# Altium PCB PCB.PcbDoc
Units mil, origin at the board's own origin, x right, y up, seen from the top; angles counter-clockwise.
Board outline 6023.62 x 2275.46 mil, 2 copper layers (Top Layer, Bottom Layer); 31 components, 24 nets, 110 pads, 32 vias.
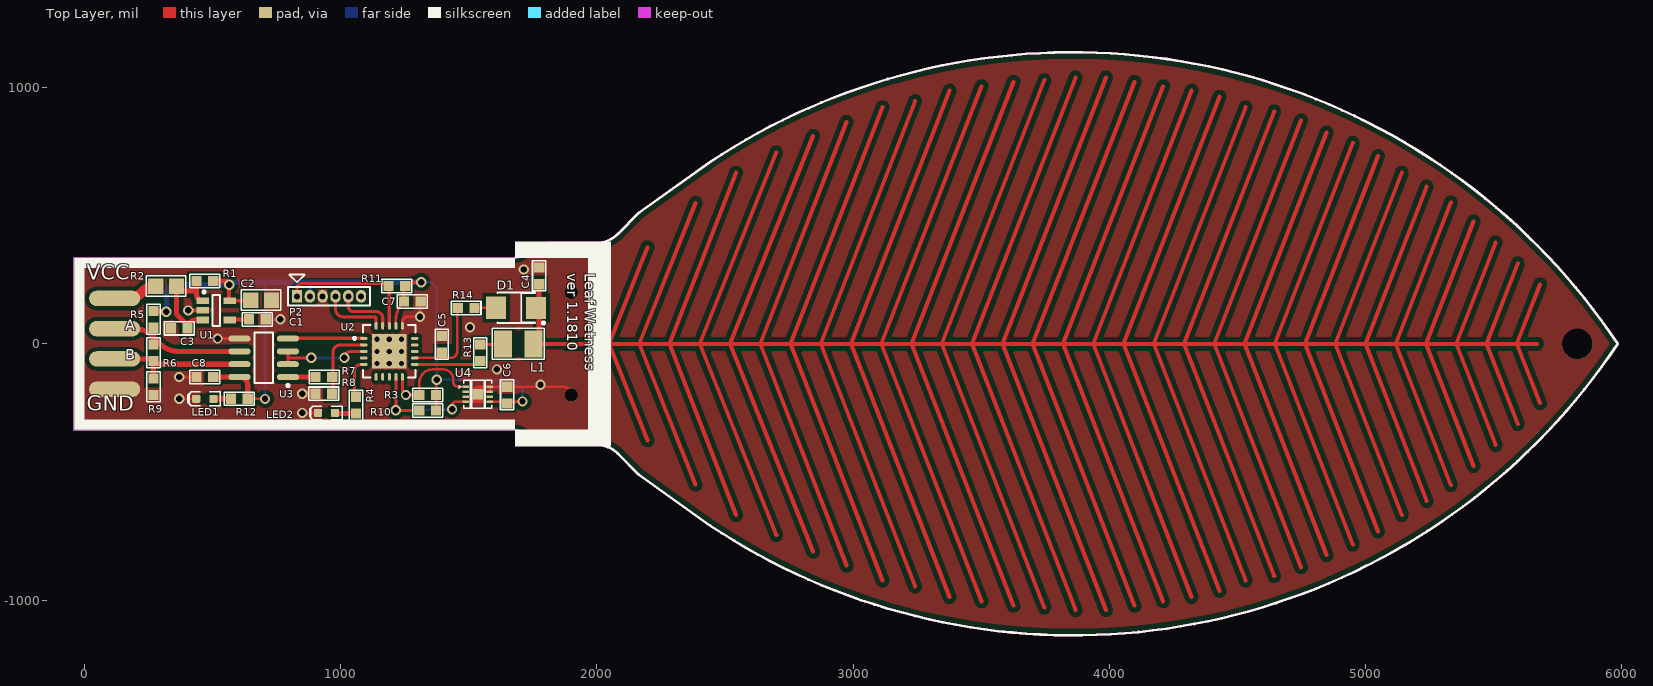
[diagram p0: Top Layer view]
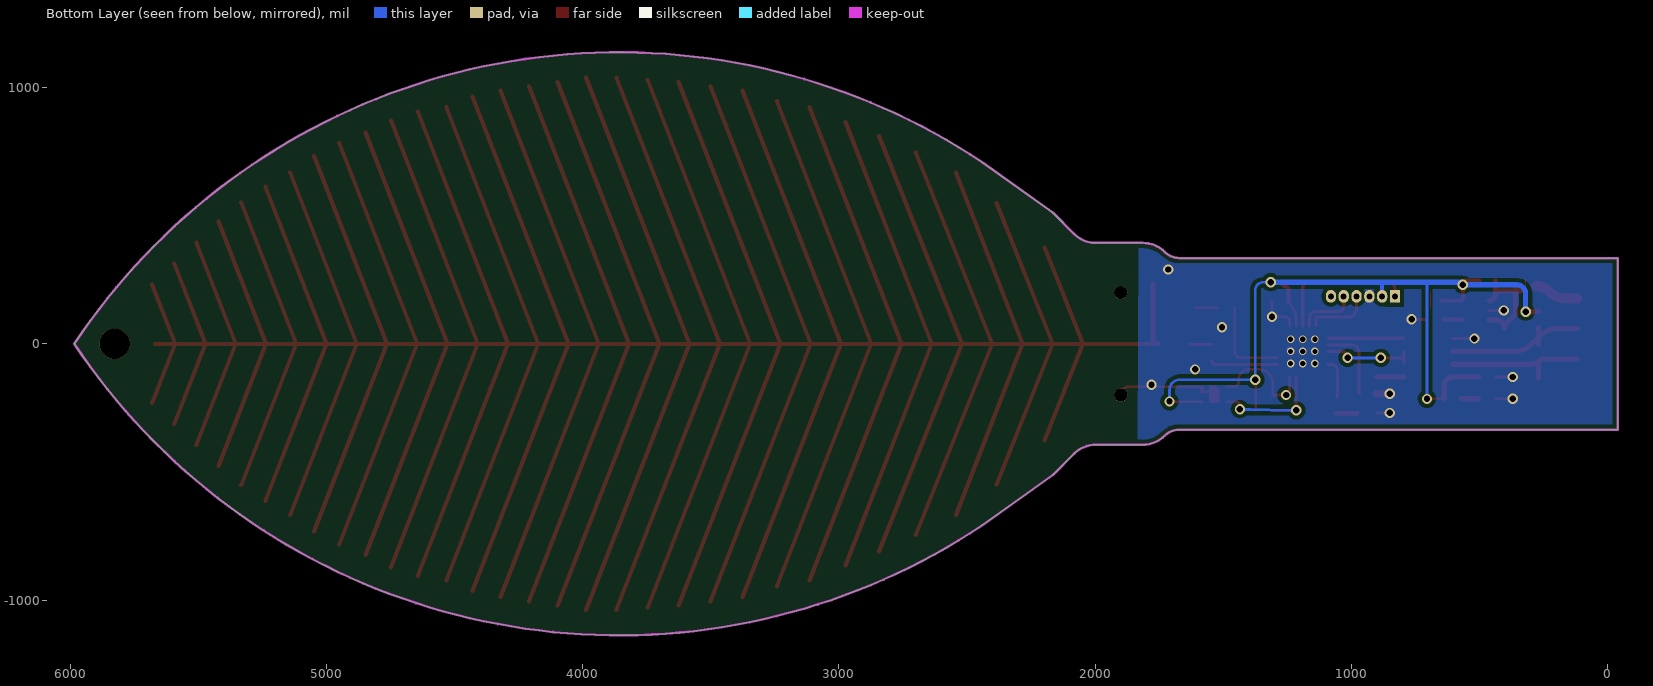
[diagram p1: Bottom Layer view, seen from below]

## Layer stack, top to bottom
Top Solder: solder mask 0.4, Solder Resist, Dk 3.5
Top Layer: signal copper 1.4
Dielectric1: dielectric 12.6, FR-4, Dk 4.8
Bottom Layer: signal copper 1.4
Bottom Solder: solder mask 0.4, Solder Resist, Dk 3.5

## Board outline
1576.71,-334.65 1671.13,-334.65 cw(c1671.13,-415.56) 1728.35,-358.35 ccw(c1813.7,-272.99) 1813.7,-393.7 1997.24,-393.7 cw(c1997.24,-514.41) 2082.6,-429.06 2165.35,-511.81 2440.94,-708.66 ccw(c3858.27,1417.32) 5984.25,0 ccw(c3858.27,-1417.32) 2440.94,708.66 2165.35,511.81 2082.6,429.06 cw(c1997.24,514.41) 1997.24,393.7 1813.7,393.7 ccw(c1813.7,272.99) 1728.35,358.35 cw(c1671.13,415.56) 1671.13,334.65 -39.37,334.65 -39.37,-334.65

## Design rules (kind name [scope] priority, off if disabled: settings)
Clearance [All] p1: gap=7 ignorepadtopadclearanceinfootprint=FALSE
ComponentClearance [All] p1 off: gap=10 collisioncheckmode=3 verticalgap=10 showdistances=FALSE
PlaneConnect [All] p1: planeconnectstyle=Direct reliefexpansion=20 reliefentries=4 reliefconductorwidth=10 reliefairgap=10
PolygonConnect [All] p1: connectstyle=Direct reliefconductorwidth=10 reliefentries=4 polygonreliefangle="90 Angle" airgapwidth=10
RoutingVias [All] p1: holewidth=25 width=40 viastyle="Through Hole" minholewidth=20 minwidth=35 maxholewidth=28 maxwidth=50
SolderMaskExpansion [All] p1: expansion=4
Width [All] p1: maxlimit=40 minlimit=10 preferedwidth=10
28 further rules are at their usual default settings.

## Classes and differential pairs
component class Sensor: C4 C5 C6 D1 L1 R13 R14 U4
component class MCU: C7 LED2 P2 R3 R4 R10 R11 U2
component class PowerSupply: C1 C2 C3 LED1 R1 R2 R12 U1
component class RS485: C8 R5 R6 R7 R8 R9 U3

## Components (designator, comment, footprint, x,y, rotation, side; value= is the part's Value field where it differs from the comment)
C1 "100nF" 0603 675,95.35 r180 top
C2 "2.2uF" 0805 690,170.35 r180 top value=100nF
C3 "100nF" 0603 370,60.35 r0 top
C4 "1nF" 0603 1775,265 r270 top
C5 "10nF" 0603 1395,-2.44 r270 top
C6 "100nF" 0603 1650,-200 r270 top
C7 "100nF" 0603 1280,165.35 r0 top
C8 "100nF" 0603 470,-129.65 r180 top
D1 "1N4148" D1810 1685,140 r180 top
L1 "1uH" 1210 1692.91,0 r0 top value=1.5µH
LED1 "RED" LED-0603-RED 470,-214.65 r180 top
LED2 "White" LED-0603-RED 945,-269.65 r180 top
P2 "Header 6" MHDR1X6 830,185.35 r0 top
R1 "dnp" 0603 470,245.35 r180 top value=1M
R2 "RTCC" 0805 319.25,225.04 r0 top
R3 "10k" 0603 1340,-199.65 r0 top value=1K
R4 "1k" 0603 1060,-239.65 r270 top value=1K
R5 "100k" 0603 269.69,95.04 r270 top value=4K7
R6 "dnp" 0603 269.69,-34.96 r270 top value=4K7
R7 "1k" 0603 935,-129.65 r180 top value=1M
R8 "dnp" 0603 935,-194.65 r0 top value=1M
R9 "100k" 0603 269.69,-167.52 r270 top value=4K7
R10 "10k" 0603 1340,-260 r0 top value=1K
R11 "10k" 0603 1220,225.35 r0 top value=1K
R12 "10k" 0603 605,-214.65 r0 top value=1M
R13 "150 1%" 0603 1545,-35 r90 top value=1M
R14 "1M" 0603 1490,140 r0 top
U1 "MIC5319-3.3" sot23-5 515,130.35 r270 top
U2 "PIC24F16KL401-I/MQ" QFN-MQ20_N 1190,-29.65 r0 top
U3 "ISL83485IBZ" SO8 700,-54.65 r180 top
U4 "SHT30" QFN50P250X250X100_HS-9N 1535.43,-196.85 r0 top

## Footprints (in the part's own frame and the unit in brackets; to place one, negate y for a bottom-side part, rotate by r counter-clockwise, add the part's x,y. Pads: shape width x height; smd on the part's side, far side on the other; paste and mask are expansions set on the pad)
0603 [mil]
  rect 40x40 smd: 1(-32.56,0) 2(32.56,0)
  silkscreen extent -59,-26 58,26, body extent -34,-19 34,19, height 51
0805 [mil]
  rect 60x60 smd: 1(-40.43,0) 2(40.43,0)
  Top Layer lines w0: 0,27 0,28 0,-28
  silkscreen extent -77,-40 77,40, body extent -42,-28 42,28, height 28
1210 [mil]
  rect 70x105 smd: 1(-59.75,0) 2(59.75,0)
  Top Layer pour cut-out: -23,53 22,53 22,-53 -23,-53
  silkscreen extent -101,-60 102,60, body extent -66,-52 66,52, height 35
D1810 [mil]
  rect 78.74x86.61 smd: 1(78,-0.5) 2(-78,0.5)
  silkscreen extent -111,-60 73,63, body extent -90,-54 95,52, height 35
LED-0603-RED [mm]
  round 0.254 on Mech15: 0(0,0)
  rrect25% 0.8x0.8 smd: A(-0.85,0) K(0.85,0)
  Top Layer pour cut-out: -0.5,0.5 0.5,0.5 0.5,-0.5 -0.5,-0.5
  silkscreen extent -1.55,-0.67 1.68,0.67, body extent -0.8,-0.4 0.8,0.4, height 0.75
MHDR1X6 [mil] "Connector; Header; 6 Position"
  rect 40x50 hole 23.62: 1(0,0)
  oval 40x50 hole 23.62: 2(50,0) 3(100,0) 4(150,0) 5(200,0) 6(250,0)
  silkscreen extent -35,-35 285,35
QFN50P250X250X100_HS-9N [mm] "QFN, 8-Leads, Body 2.50x2.50mm, Pitch 0.50mm, Thermal Pad 1.80x1.10mm, IPC Medium Density"
  rect 1x1 smd paste+0.1: 0(0,0)
  rect 0.65x0.25 smd paste+0.1: 1(-1.2,0.75) 2(-1.2,0.25) 3(-1.2,-0.25) 4(-1.2,-0.75) 5(1.2,-0.75) 6(1.2,-0.25) 7(1.2,0.25) 8(1.2,0.75)
  Top Layer region: 0.5,-0.85 0.5,0.85 -0.175,0.85 -0.5,0.525 -0.5,-0.85
  silkscreen extent -1.88,-1.37 1.38,1.38, body extent -1.3,-1.3 1.3,1.3, height 1
QFN-MQ20_N [mm] "QFN, 20-Leads, Body 5x5 mm, Pitch 0.65mm, IPC Medium Density"
  oval 0.75x0.3 smd: 1(-2.525,1.3) 2(-2.525,0.65) 3(-2.525,0) 4(-2.525,-0.65) 5(-2.525,-1.3) 11(2.525,-1.3) 12(2.525,-0.65) 13(2.525,0) 14(2.525,0.65) 15(2.525,1.3)
  oval 0.3x0.75 smd: 6(-1.3,-2.525) 7(-0.65,-2.525) 8(0,-2.525) 9(0.65,-2.525) 10(1.3,-2.525) 16(1.3,2.525) 17(0.65,2.525) 18(0,2.525) 19(-0.65,2.525) 20(-1.3,2.525)
  rect 3.4x3.4 smd: 21(0,0)
  silkscreen extent -3.57,-2.6 2.6,2.6, body extent -2.58,-2.58 2.58,2.58, height 1
SO8 [mm]
  oval 2.2x0.6 smd: 1(-2.4,1.905) 2(-2.4,0.635) 3(-2.4,-0.635) 4(-2.4,-1.905) 5(2.4,-1.905) 6(2.4,-0.635) 7(2.4,0.635) 8(2.4,1.905)
  silkscreen extent -2.53,-2.5 0.9,2.88, body extent -2,-2.5 2,2.5, height 1.75
sot23-5 [mm]
  rect 0.65x1.25 smd: 1(-0.95,-1.327) 2(0,-1.327) 3(0.95,-1.327) 4(0.95,1.327) 5(-0.95,1.327)
  silkscreen extent -1.95,-1.32 1.55,0.38, body extent -1.55,-0.9 1.55,0.9, height 1.45

## Part data
C1 C2 C3 C7 C8: library part "Cap Semi", "Capacitor (Semiconductor SIM Model)", LatestRevisionDate=29-May-2009, LatestRevisionNote="IPC-7351 Footprint Added.", PackageDescription="Chip Capacitor", PackageReference=C1206, Published=8-Jun-2000, Publisher="Altium Limited"
C4 C5 C6: library part C_0402, Manufacturer=AVX, Manufacturer Part Number=04023A101JAT2A, Supplier Part Number 1=1327622, ComponentLink1Description=http://www.avx.com/docs/Catalogs/ccog.pdf, ComponentLink1URL=http://www.avx.com/docs/Catalogs/ccog.pdf, Pricing 1="10=0,129, 100=0,099, 500=0,067, 1000=0,056, 5000=0,043 (EUR)", RoHS=YES, Stock 1=84696, Supplier 1=Farnell
D1: library part Diode, "Default Diode", Code_JEDEC=DO-214-AB, LatestRevisionDate=17-Jul-2002, LatestRevisionNote="Re-released for DXP Platform.", PackageDescription="DO-214-AB/SMC; 2 C-Bend Leads; Body 7.9 x 5.9 mm, inc. leads (LxW)", PackageReference=SMC, PackageVersion=Sep-1996, Published=8-Jun-2000, Publisher="Altium Limited"
L1: library part Inductor, "Inductor", Code_IEC=1005, Code_JEITA=0402, LatestRevisionDate=29-May-2009, LatestRevisionNote="IPC-7351 Footprint Added.", PackageDescription="Chip Inductor", PackageReference=0402-A, Published=8-Jun-2000, Publisher="Altium Limited"
LED1 LED2: library part SMD_LED_0805
P2: "Header, 6-Pin", LatestRevisionDate=17-Jul-2002, LatestRevisionNote="Re-released for DXP Platform.", Publisher="Altium Limited"
R1 R5 R6 R7 R8 R9 R12 R13 R14: library part "Res Semi", "Semiconductor Resistor", LatestRevisionDate=17-Jul-2002, LatestRevisionNote="Re-released for DXP Platform.", PackageReference=AXIAL-0.5, Published=8-Jun-2000, Publisher="Altium Limited"
R2: library part Ferritbeat, Manufacturer=MURATA, Manufacturer Part Number=BLM18EG471SN1D, Supplier Part Number 1=1515722, ComponentLink1Description=http://www.farnell.com/datasheets/5169.pdf, ComponentLink1URL=http://www.farnell.com/datasheets/5169.pdf, Pricing 1="5=0,196, 50=0,17, 100=0,14, 250=0,112, 500=0,101, 2000=0,092 (EUR)", RoHS=YES, Stock 1=11384, Supplier 1=Farnell
R3 R4 R10 R11: library part Res1, "Resistor", LatestRevisionDate=17-Jul-2002, LatestRevisionNote="Re-released for DXP Platform.", PackageReference=AXIAL-0.3, Published=8-Jun-2000, Publisher="Altium Limited"
U1: library part MIC5305
U2: library part PIC24F04KA201T-I/MQ, "General Purpose 16-Bit Flash Microcontroller with nanoWatt XLP Technology, 4KB Flash, 512 bytes SRAM, 20-Pin QFN, Industrial Temperature, Tape and Reel", Supplier Part Number 1=PIC24F04KA201T-I/MQ-ND, ComponentLink1Description=Datasheet, ComponentLink1URL=http://ww1.microchip.com/downloads/en/DeviceDoc/39937b.pdf, ComponentLink2Description="Packaging Specification", ComponentLink2URL=http://www.microchip.com/stellent/groups/techpub_sg/documents/packagingspec/en012702.pdf, ComponentLink3Description="Microchip.com Home", ComponentLink3URL=http://www.microchip.com/, DatasheetVersion="revB, May-2009", FirstPublished=2-Dec-2009, PackageDescription="20-Lead Plastic Quad Flat, No Lead Package (MQ) - 5x5x0.9 mm Body [QFN]", PackageReference=QFN-MQ20, PackageVersion="revBB, Aug-2009", Publisher="Altium Limited", Supplier 1=Digi-Key, Supplier 2=Newark, Supplier Part Number 2=08R2010
U3: library part SN75176AD, "Differential Bus Transceiver", Code_IPC=SOIC127P600-8, ComponentLink1Description="Manufacturer Link", ComponentLink1URL=http://www.ti.com/, ComponentLink2Description=Datasheet, ComponentLink2URL=http://www-s.ti.com/sc/ds/sn75176a.pdf, DatasheetVersion=Aug-1989, LatestRevisionDate=13-Apr-2006, LatestRevisionNote="IPC-7351 Footprint Added.", Note="Receiver Hysteresis of 50mV Typical", PackageDescription="8-Pin Small Outline Integrated Circuit 1.27 mm Pitch", PackageReference=D008, PackageVersion=Jan-1998, Published=15-May-2002, Publisher="Altium Limited"
U4: library part SHT3x

## Free pads (board coordinates)
  oval 200x60 smd paste+3.94: 1(118.11,-177.17) 1(118.11,-59.06) 1(118.11,59.06) 1(118.11,177.17)
  round 51.18 hole 51.18: ""(1900,-200) ""(1900,200)
  round 118.11 hole 118.11: ""(5826.77,0)

## Via types
v1: diameter 40, hole 25, Top Layer to Bottom Layer, 23 vias
v2: diameter 30, hole 20, Top Layer to Bottom Layer, tented top, 9 vias

## Nets (pads, with @x,y where several pads share a name; then routed paths per layer and width w, separated by ;. In a path a pad name is that pad's centre, name@x,y a point inside that pad or via, vN(x,y) a via of type N, cw(c..) or ccw(c..) an arc to the next point about the centre after c; other vN are vias at no path point)
GND: C1.1 C2.1 C3.1 C4.1 C5.1 C6.1 C7.2 C8.2 LED1.K LED2.K P2.3 pad. pad.1@118.11,-177.17 R8.1 R9.2 U1.2 U2.16 U2.21 U3.5 U4.0 U4.7 U4.8 | length 1018
  Top Layer w11: v1(370,-214.65) LED1.K ; v1(370,-129.65) 370,-134.65 cw(c375,-134.65) 375,-129.65 C8.2 ; v1(405,130.35) U1.2 ; v1(520,20.35) U3.5 ; C1.1 v1(765,95.35) ; v1(850,-269.65) LED2.K@901.54,-269.65 ; U2.16 1241.18,86.54 cw(c1260,86.54) 1260,105.35 v1(1310,105.35) ; v1@1310,115.35 1310,162.8 cw(c1312.56,162.8) C7.2 ; U4.0 cw(c1545.28,-196.85) 1545.28,-187.01 U4.7 U4.8 1867.32,-167.32 cw(c1867.32,-200) pad.@1900,-200
  Top Layer w30: v1(850,-194.65) R8.1
  Bottom Layer w11: v2(1237.24,-29.65) cw(c1246.89,-29.65) v2@1246.89,-20
  other v1: 1780,-160 1610,-100 1505,65 1715,290
  other v2: 1142.76,-76.89 1190,-76.89 1237.24,-76.89 1142.76,-29.65 1190,-29.65 1142.76,17.6 1190,17.6 1237.24,17.6
LED_DEBUG: R4.1 U2.5 | length 154.5
  Top Layer w12: R4.1 cw(c1060,-202.09) 1055,-202.09 1055,-104.65 cw(c1078.82,-104.65) 1078.82,-80.83 U2.5
MCU_PGC: P2.5 U2.19 | length 230.9
  Top Layer w12: P2.5 1030,145.35 ccw(c1050,145.35) 1050,125.35 1140,125.35 cw(c1140,100.94) 1164.41,100.94 U2.19
MCU_PGD: P2.4 U2.20 | length 257.7
  Top Layer w12: P2.4 980,135.35 ccw(c1010,135.35) 1010,105.35 1130,105.35 cw(c1130,96.54) 1138.82,96.54 U2.20
MCU_RESET: P2.1 R11.1 U2.18 | length 561.6
  Top Layer w12: P2.1 830,215.35 cw(c850,215.35) 850,235.35 1177.44,235.35 cw(c1177.44,225.35) R11.1 cw(c1187.44,222.8) 1190,222.8 U2.18
NetC1_2: C1.2 U1.4 | length 76.6
  Top Layer w15: U1.4 cw(c569.65,92.95) 569.65,95.35 C1.2
NetC3_2: C3.2 R1.2 R2.2 U1.1 U1.3 | length 451
  Top Layer w20: R2.2@340,205.35 R2.2@359.69,205.35 ; R2.2 R2.2@359.69,205.35 ; R1.2 437.44,205.35 ; U1.3 435.16,92.95 ccw(c435.16,60.35) C3.2 402.56,72.44 359.69,115.31 R2.2@359.69,205.35 ; R2.2@359.69,205.35 437.44,205.35 ; 437.44,205.35 437.44,193.07 ccw(c462.76,193.07) U1.1@462.49,167.76 ; U1.1@462.49,167.76 ccw(c462.76,193.07) U1.1 U1.1@462.49,167.76
NetD1_1: D1.1 R14.2 | length 84.9
  Top Layer w10: R14.2 1522.56,140.5 D1.1
NetL1_1: L1.1 R13.2 | length 89.2
  Top Layer w11: R13.2 1630.72,-2.44 L1.1
NetLED1_A: LED1.A R12.1 | length 69
  Top Layer w20: LED1.A R12.1
NetLED2_A: LED2.A R4.2 | length 83
  Top Layer w20: LED2.A ccw(c981.02,-269.65) 981.02,-272.2 R4.2
NetR7_2: R7.2 U3.1 | length 108
  Top Layer w20: U3.1 R7.2
PulseOut: R13.1 U2.11 | length 263.2
  Top Layer w12: U2.11 1531.73,-80.83 ccw(c1531.73,-67.56) R13.1
RS485_A: pad.1@118.11,59.06 R5.2 R6.1 U3.6 | length 580.4
  Top Layer w20: pad.1@118.11,59.06 194.8,59.06 cw(c194.8,-40.94) 265.51,29.77 269.69,25.59 ; R6.1 269.69,25.59 ; R5.2 269.69,25.59 ; U3.6 366.34,-29.65 cw(c366.34,70.35) 295.63,-0.36 269.69,25.59
RS485_B: pad.1@118.11,-59.06 R6.2 R9.1 U3.7 | length 560.3
  Top Layer w20: pad.1@118.11,-59.06 249.25,-59.06 cw(c249.25,-87.96) R6.2 ; R9.1 R6.2 ; U3.7 298.96,-79.65 cw(c298.96,-38.24) R6.2
SCL: R10.1 U2.9 U4.4 | length 499
  Top Layer w10: v1(1435,-255) 1435,-240 cw(c1448.62,-240) 1448.62,-226.38 U4.4
  Top Layer w12: v1(1215,-259.65) v1@1215.59,-259.65 ; U2.9 v1@1215.59,-259.65 ; R10.1@1307.44,-259.65 v1@1215.59,-259.65
  Bottom Layer w12: v1(1215,-259.65) 1240.16,-259.65 1394.04,-257.21 1415.03,-256.88
SDA: R3.1 U2.10 U4.1 | length 433.7
  Top Layer w10: R3.1 1307.44,-151.7 cw(c1359.14,-151.7) 1359.14,-100 1400,-100 cw(c1400,-140) 1440,-140 1440,-150 ccw(c1457.32,-150) 1457.32,-167.32 U4.1
  Top Layer w12: U2.10 1241.18,-175.83 ccw(c1260,-175.83) v1@1256.13,-194.24 ; v1(1255,-199.65) R3.1
  Bottom Layer w12: v1@1250,-204.65 cw(c1255,-204.65) v1(1255,-199.65)
SENSOR_DR: U2.3 U3.2 U3.3 | length 359.9
  Top Layer w12: U3.2 U3.3 ; 795,-54.65 v1(885,-54.65) ; v1(1015,-54.65) cw(c1040,-54.65) 1040,-29.65 U2.3
  Bottom Layer w12: v1(885,-54.65) v1(1015,-54.65)
SENSOR_RX: U2.1 U3.4 | length 297.3
  Top Layer w12: U3.4 794.49,21.54 U2.1
SENSOR_TX: R7.1 R8.2 U2.2 | length 299.4
  Top Layer w12: R8.2 ccw(c967.56,-192.2) 970,-192.2 970,-34.65 cw(c1000.59,-34.65) 1000.59,-4.06 U2.2
SensorCap: C4.2 D1.2 L1.2 | length 56290.9
  Top Layer w15.75: L1.2 1752.81,0 2047.24,0 ; 2197.94,-376.73 2047.24,0 ; 2197.94,376.73 2047.24,0 ; 2385.28,-549.82 2165.35,0 ; 2385.28,549.82 2165.35,0 ; 2543.17,-667.81 2283.46,0 ; 2543.17,667.81 2283.46,0 ; 2700.24,-746.67 2401.57,0 ; 2700.24,746.67 2401.57,0 ; 2844.15,-811.16 2519.69,0 ; 2844.15,811.16 2519.69,0 ; 2974.34,-865.4 2637.8,0 ; 2974.34,865.4 2637.8,0 ; 3114.99,-923.35 2755.91,0 ; 3114.99,923.35 2755.91,0 ; 3242.33,-947.1 2874.02,0 ; 3242.33,947.1 2874.02,0 ; 3376.33,-987.95 2992.13,0 ; 3376.33,987.95 2992.13,0 ; 3501.09,-1005.05 3110.24,0 ; 3501.09,1005.05 3110.24,0 ; 3625.85,-1022.14 3228.35,0 ; 3625.85,1022.14 3228.35,0 ; 3746.54,-1028.79 3346.46,0 ; 3746.54,1028.79 3346.46,0 ; 3868.72,-1039.24 3464.57,0 ; 3868.72,1039.24 3464.57,0 ; 3986.83,-1039.24 3582.68,0 ; 3986.83,1039.24 3582.68,0 ; 4098.29,-1022.14 3700.79,0 ; 4098.29,1022.14 3700.79,0 ; 4209.75,-1005.05 3818.9,0 ; 4209.75,1005.05 3818.9,0 ; 4321.21,-987.95 3937.01,0 ; 4321.21,987.95 3937.01,0 ; 4430.08,-964.2 4055.12,0 ; 4430.08,964.2 4055.12,0 ; 4532.31,-923.35 4173.23,0 ; 4532.31,923.35 4173.23,0 ; 4643.77,-906.25 4291.34,0 ; 4643.77,906.25 4291.34,0 ; 4748.58,-872.05 4409.45,0 ; 4748.58,872.05 4409.45,0 ; 4848.22,-824.56 4527.56,0 ; 4848.22,824.56 4527.56,0 ; 4950.44,-783.71 4645.67,0 ; 4950.44,783.71 4645.67,0 ; 5048.61,-732.41 4763.78,0 ; 5048.61,732.41 4763.78,0 ; 5141.6,-667.81 4881.89,0 ; 5141.6,667.81 4881.89,0 ; 5238.65,-613.67 5000,0 ; 5238.65,613.67 5000,0 ; 5332.75,-551.92 5118.11,0 ; 5332.75,551.92 5118.11,0 ; 5421.67,-476.87 5236.22,0 ; 5421.67,476.87 5236.22,0 ; 5508.01,-395.18 5354.33,0 ; 5508.01,395.18 5354.33,0 ; 5594.35,-313.48 5472.44,0 ; 5594.35,313.48 5472.44,0 ; 5669.29,0 5590.55,0 ; 5680.69,-231.79 5590.55,0 ; 5680.69,231.79 5590.55,0 ; 2047.24,0 2165.35,0 ; 2165.35,0 2283.46,0 ; 2283.46,0 2401.57,0 ; 2401.57,0 2519.69,0 ; 2519.69,0 2637.8,0 ; 2637.8,0 2755.91,0 ; 2755.91,0 2874.02,0 ; 2874.02,0 2992.13,0 ; 2992.13,0 3110.24,0 ; 3110.24,0 3228.35,0 ; 3228.35,0 3346.46,0 ; 3346.46,0 3464.57,0 ; 3464.57,0 3582.68,0 ; 3582.68,0 3700.79,0 ; 3700.79,0 3818.9,0 ; 3818.9,0 3937.01,0 ; 3937.01,0 4055.12,0 ; 4055.12,0 4173.23,0 ; 4173.23,0 4291.34,0 ; 4291.34,0 4409.45,0 ; 4409.45,0 4527.56,0 ; 4527.56,0 4645.67,0 ; 4645.67,0 4763.78,0 ; 4763.78,0 4881.89,0 ; 4881.89,0 5000,0 ; 5000,0 5118.11,0 ; 5118.11,0 5236.22,0 ; 5236.22,0 5354.33,0 ; 5354.33,0 5472.44,0 ; 5472.44,0 5590.55,0
  Top Layer w20: L1.2 ccw(c1752.66,22.34) 1752.81,0 ccw(c1752.66,22.34) 1775,22.34 C4.2
SM_VoltageIn: C5.2 R14.1 U2.12 | length 351.4
  Top Layer w10: U2.12 1429.76,-55.24 ccw(c1429.76,-30) 1455,-30 1455,137.56 cw(c1457.44,137.56) R14.1
V+3.3: C2.2 C6.2 C7.1 C8.1 P2.2 R1.1 R3.2 R5.1 R10.2 R11.2 R12.2 U1.5 U2.17 U3.8 U4.5 | length 3451.8
  Top Layer w10: R12.2 637.56,-215 v1(705,-215) ; R10.2 R3.2 1372.56,-142.44 cw(c1375,-142.44) v1(1375,-140) ; U4.5 1708.62,-226.38 ccw(c1708.62,-225) v1(1710,-225)
  Top Layer w11: U2.17 1215.59,92.08 cw(c1315.59,92.08) 1244.88,162.79 C7.1
  Top Layer w15: v1(565,230.35) 565,175.51 570,170.51 cw(c567.24,170.51) U1.5 646.97,167.76 ccw(c646.97,170.35) C2.2 ; C7.1@1244.88,162.79 1244.88,206.82 cw(c1263.42,206.82) 1263.42,225.35 1278.42,240.35 v1(1315,240.35)
  Top Layer w20: R5.1@267.44,125.35 v1(320,125.35) ; C8.1 U3.8 cw(c605.51,-161.69) 637.56,-161.69 R12.2 ; R1.1 550,245.35 cw(c550,230.35) v1(565,230.35)
  Bottom Layer w10: v1(705,-215) 705,235.35 ; v1(1315,240.35) 1315,240 1345,240 cw(c1345,210) 1375,210 v1(1375,-140) 1670,-140 cw(c1670,-180) 1710,-180 v1(1710,-225)
  Bottom Layer w15: P2.2 880,240.35
  Bottom Layer w20: v1(320,125.35) 320,195.35 cw(c355,195.35) 355,230.35 v1(565,230.35) cw(c575,230.35) 575,240.35 710,240.35 ; 705,235.35 cw(c710,235.35) 710,240.35 ; v1@1300,240.35 880,240.35 710,240.35
V+IN: pad.1@118.11,177.17 R2.1 | length 173.5
  Top Layer w40: pad.1@118.11,177.17 163.24,177.17 ccw(c163.24,270.28) 229.08,204.44 cw(c278.82,154.7) R2.1
pads on no net: LED1.0 LED2.0 P2.6 U2.4 U2.6 U2.7 U2.8 U2.13 U2.14 U2.15 U4.2 U4.3 U4.6

## Polygon pours and split planes (outlines as drawn)
GND on Top Layer "GND_L01_P002" (solid, remove dead copper, pour order 2): -39.37,334.65 -39.37,-334.65 1689.65,-334.65 1736.47,-381.47 1870,-400 1870,393.7 1731.47,381.47 1684.65,334.65
GND on Top Layer "GND_L01_P000" (solid, remove dead copper, pour order 0): 1850.39,393.7 2992.13,1082.68 4055.12,1141.73 5255.91,885.83 5984.25,0 5393.7,-748.03 4468.5,-1082.68 3543.31,-1200.79 2244.09,-688.98 1850.39,-393.7
GND on Bottom Layer "GND_L02_P004" (solid, remove dead copper, pour order 4): 1830,393.7 1753.7,393.7 1695,335 -39.02,335 -39.37,334.65 -39.37,-334.65 1704.65,-334.65 1835,-429.06

## Keep-outs
Keep-Out Layer:
  lines w10: -39.37,-334.65 -39.37,0 -39.37,334.65 1576.71,334.65 1671.13,334.65 ccw(c1671.13,415.56) 1728.35,358.35 cw(c1813.7,272.99) 1813.7,393.7 1850,393.7 1997.24,393.7 ccw(c1997.24,514.41) 2082.6,429.06 2165.35,511.81 2440.94,708.66 cw(c3858.27,-1417.32) 5984.25,0 cw(c3858.27,1417.32) 2440.94,-708.66 2165.35,-511.81 2082.6,-429.06 ccw(c1997.24,-514.41) 1997.24,-393.7 1850,-393.7 1813.7,-393.7 cw(c1813.7,-272.99) 1728.35,-358.35 ccw(c1671.13,-415.56) 1671.13,-334.65 1576.71,-334.65 -39.37,-334.65

## Silkscreen, mask and mechanical layers (free items; w line width, h text height)
Top Overlay:
  rectangle: 1680,-400 2055,-334.65
  rectangle: 1680,334.65 2055,400
  rectangle: 1965,-390 2055,400
  region: 1566.93,-250.98 1566.93,-141.73 1556.93,-141.73 1556.93,-250.98
  region: 1513.94,-249.02 1513.94,-142.72 1503.94,-142.72 1503.94,-249.02
  rectangle: -39.37,295.28 1680,334.65
  rectangle: -39.37,-334.65 1680,-295.28
  rectangle: -39.37,-334.65 0,334.65
  lines w7: 800,270 830,240 860,270 800,270
  lines w10: 1850,-393.7 1997.24,-393.7 cw(c1997.24,-514.41) 2082.6,-429.06 2165.35,-511.81 2440.94,-708.66 ccw(c3858.27,1417.32) 5984.25,0 ccw(c3858.27,-1417.32) 2440.94,708.66 2165.35,511.81 2082.6,429.06 cw(c1997.24,514.41) 1997.24,393.7 1850,393.7
  text "Leaf Wetness  / ver 1.1810" at 1870,275 h70 r270
  text "VCC" at 10,230 h100
  text "A" at 160,40 h70
  text "B" at 160,-75 h70
  text "GND" at 10,-280 h100
Top Solder:
  lines w15.75: 2197.94,-376.73 2047.24,0 ; 2197.94,376.73 2047.24,0 ; 2385.28,-549.82 2165.35,0 ; 2385.28,549.82 2165.35,0 ; 2543.17,-667.81 2283.46,0 ; 2543.17,667.81 2283.46,0 ; 2700.24,-746.67 2401.57,0 ; 2700.24,746.67 2401.57,0 ; 2844.15,-811.16 2519.69,0 ; 2844.15,811.16 2519.69,0 ; 2974.34,-865.4 2637.8,0 ; 2974.34,865.4 2637.8,0 ; 3114.99,-923.35 2755.91,0 ; 3114.99,923.35 2755.91,0 ; 3242.33,-947.1 2874.02,0 ; 3242.33,947.1 2874.02,0 ; 3376.33,-987.95 2992.13,0 ; 3376.33,987.95 2992.13,0 ; 3501.09,-1005.05 3110.24,0 ; 3501.09,1005.05 3110.24,0 ; 3625.85,-1022.14 3228.35,0 ; 3625.85,1022.14 3228.35,0 ; 3746.54,-1028.79 3346.46,0 ; 3746.54,1028.79 3346.46,0 ; 3868.72,-1039.24 3464.57,0 ; 3868.72,1039.24 3464.57,0 ; 3986.83,-1039.24 3582.68,0 ; 3986.83,1039.24 3582.68,0 ; 4098.29,-1022.14 3700.79,0 ; 4098.29,1022.14 3700.79,0 ; 4209.75,-1005.05 3818.9,0 ; 4209.75,1005.05 3818.9,0 ; 4321.21,-987.95 3937.01,0 ; 4321.21,987.95 3937.01,0 ; 4430.08,-964.2 4055.12,0 ; 4430.08,964.2 4055.12,0 ; 4532.31,-923.35 4173.23,0 ; 4532.31,923.35 4173.23,0 ; 4643.77,-906.25 4291.34,0 ; 4643.77,906.25 4291.34,0 ; 4748.58,-872.05 4409.45,0 ; 4748.58,872.05 4409.45,0 ; 4848.22,-824.56 4527.56,0 ; 4848.22,824.56 4527.56,0 ; 4950.44,-783.71 4645.67,0 ; 4950.44,783.71 4645.67,0 ; 5048.61,-732.41 4763.78,0 ; 5048.61,732.41 4763.78,0 ; 5141.6,-667.81 4881.89,0 ; 5141.6,667.81 4881.89,0 ; 5238.65,-613.67 5000,0 ; 5238.65,613.67 5000,0 ; 5332.75,-551.92 5118.11,0 ; 5332.75,551.92 5118.11,0 ; 5421.67,-476.87 5236.22,0 ; 5421.67,476.87 5236.22,0 ; 5508.01,-395.18 5354.33,0 ; 5508.01,395.18 5354.33,0 ; 5594.35,-313.48 5472.44,0 ; 5594.35,313.48 5472.44,0 ; 5669.29,0 5590.55,0 ; 5680.69,-231.79 5590.55,0 ; 5680.69,231.79 5590.55,0 ; 2047.24,0 2165.35,0 ; 2165.35,0 2283.46,0 ; 2165.35,0 2165.35,0 ; 2283.46,0 2401.57,0 ; 2283.46,0 2283.46,0 ; 2401.57,0 2519.69,0 ; 2401.57,0 2401.57,0 ; 2519.69,0 2637.8,0 ; 2519.69,0 2519.69,0 ; 2637.8,0 2755.91,0 ; 2637.8,0 2637.8,0 ; 2755.91,0 2874.02,0 ; 2755.91,0 2755.91,0 ; 2874.02,0 2992.13,0 ; 2874.02,0 2874.02,0 ; 2992.13,0 3110.24,0 ; 2992.13,0 2992.13,0 ; 3110.24,0 3228.35,0 ; 3110.24,0 3110.24,0 ; 3228.35,0 3346.46,0 ; 3228.35,0 3228.35,0 ; 3346.46,0 3464.57,0 ; 3346.46,0 3346.46,0 ; 3464.57,0 3582.68,0 ; 3464.57,0 3464.57,0 ; 3582.68,0 3700.79,0 ; 3582.68,0 3582.68,0 ; 3700.79,0 3818.9,0 ; 3700.79,0 3700.79,0 ; 3818.9,0 3937.01,0 ; 3818.9,0 3818.9,0 ; 3937.01,0 4055.12,0 ; 3937.01,0 3937.01,0 ; 4055.12,0 4173.23,0 ; 4055.12,0 4055.12,0 ; 4173.23,0 4291.34,0 ; 4173.23,0 4173.23,0 ; 4291.34,0 4291.34,0 ; 4291.34,0 4409.45,0 ; 4409.45,0 4527.56,0 ; 4409.45,0 4409.45,0 ; 4527.56,0 4527.56,0 ; 4527.56,0 4645.67,0 ; 4645.67,0 4763.78,0 ; 4645.67,0 4645.67,0 ; 4763.78,0 4881.89,0 ; 4763.78,0 4763.78,0 ; 4881.89,0 5000,0 ; 4881.89,0 4881.89,0 ; 5000,0 5118.11,0 ; 5000,0 5000,0 ; 5118.11,0 5236.22,0 ; 5118.11,0 5118.11,0 ; 5236.22,0 5354.33,0 ; 5236.22,0 5236.22,0 ; 5354.33,0 5472.44,0 ; 5354.33,0 5354.33,0 ; 5472.44,0 5590.55,0 ; 5472.44,0 5472.44,0 ; 5590.55,0 5590.55,0
Bottom Solder:
  region: 1594.49,-248.97 1594.49,-145.03 1474.49,-145.03 1474.49,-248.97

## Dimensions
-45,340 to -39.37,-334.65 on Top Overlay
-39.37,334.65 to 2060,335 on Top Overlay